# Altium PCB rev2.PcbDoc
Units mil, origin at the board's own origin, x right, y up, seen from the top; angles counter-clockwise.
Board outline 1000 x 800 mil, 2 copper layers (Top Layer, Bottom Layer); 3 components, 16 nets, 32 pads, 0 vias.
Unrouted connection lines stored in the file: 16.
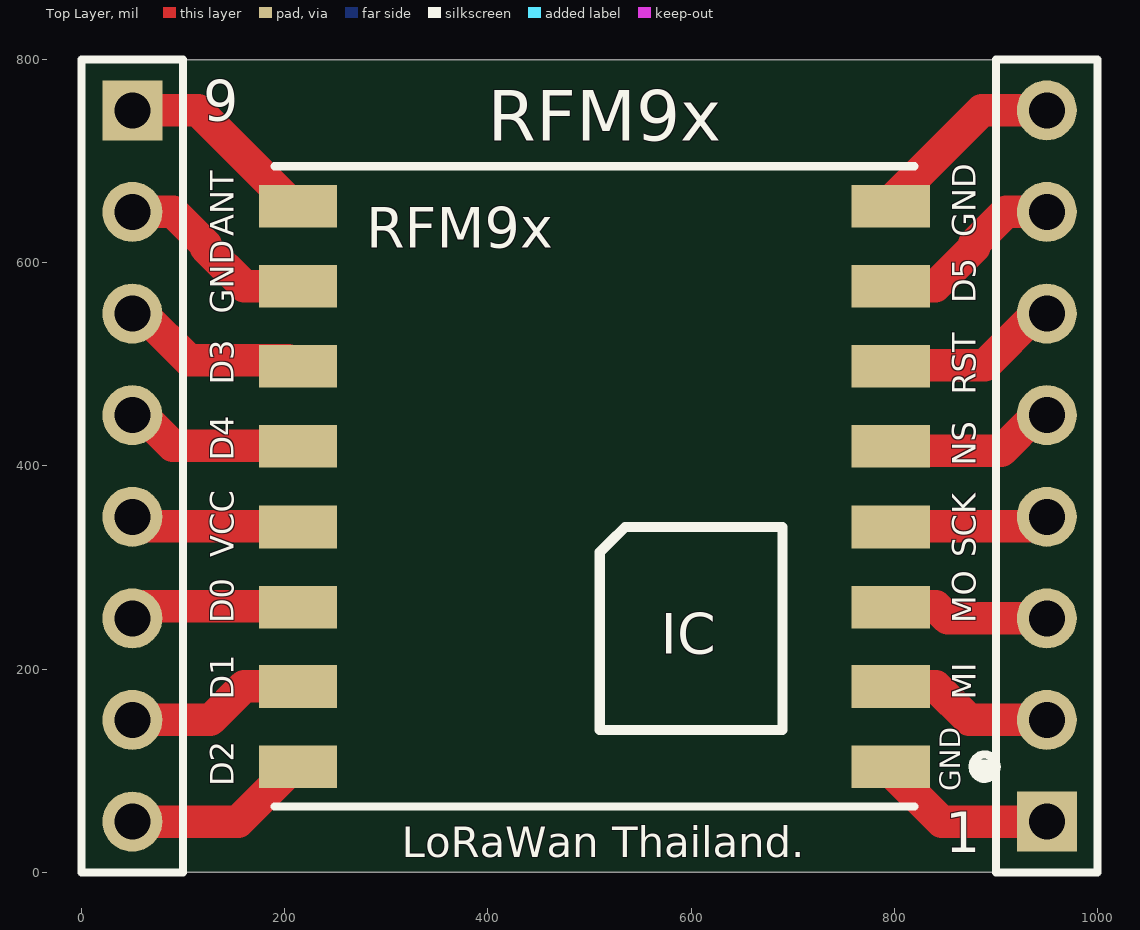
[diagram p0: Top Layer view]
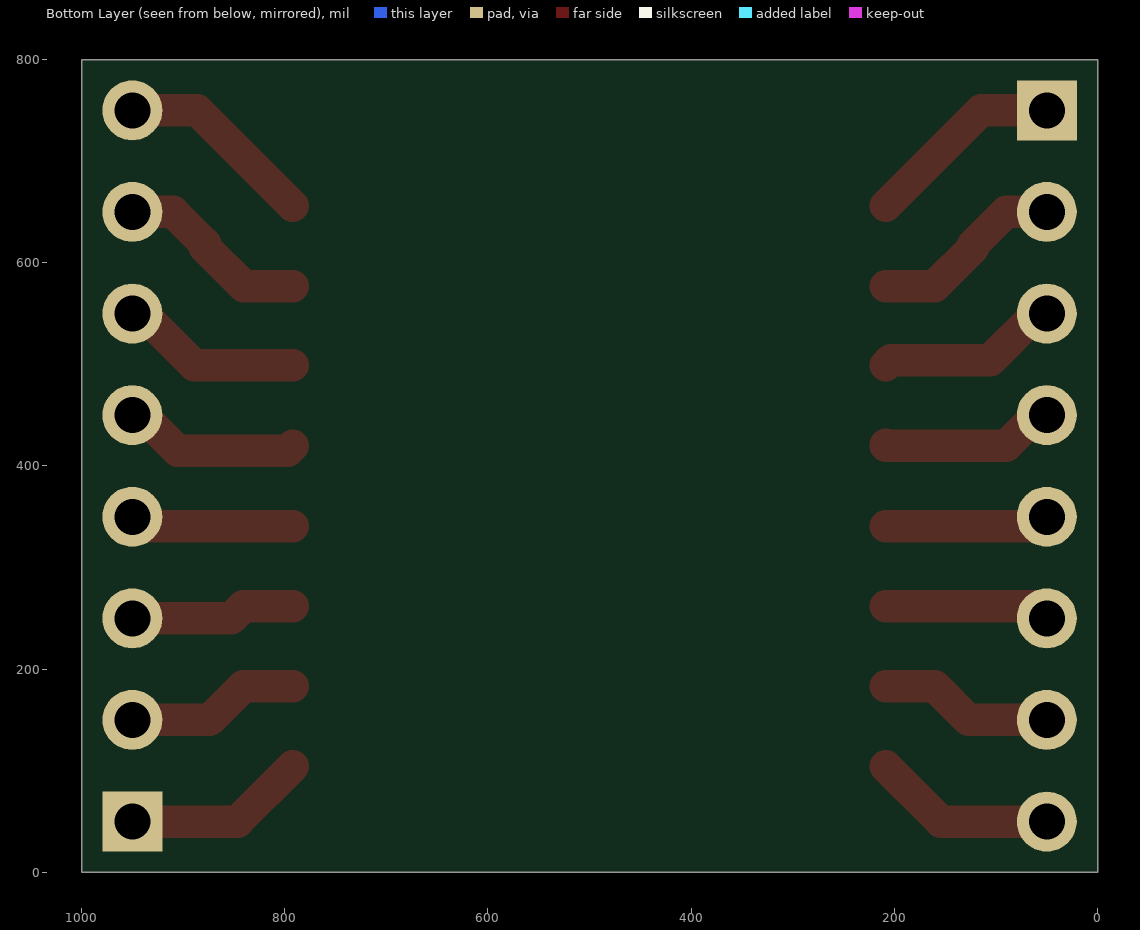
[diagram p1: Bottom Layer view, seen from below]

## Layer stack, top to bottom
Top Solder: solder mask 0.4, Solder Resist, Dk 3.5
Top Layer: signal copper 1.4
Dielectric 1: dielectric 12.6, FR-4, Dk 4.8
Bottom Layer: signal copper 1.4
Bottom Solder: solder mask 0.4, Solder Resist, Dk 3.5

## Board outline
0,0 0,800 1000,800 1000,0

## Design rules (kind name [scope] priority, off if disabled: settings)
Clearance [All] p1: gap=32
PolygonConnect [All] p1: connectstyle=Relief reliefconductorwidth=10 reliefentries=4 polygonreliefangle="90 Angle" airgapwidth=10
RoutingVias [All] p1: holewidth=28 width=50 viastyle="Through Hole" minholewidth=28 minwidth=50 maxholewidth=28 maxwidth=50
SolderMaskExpansion [All] p1: expansion=4
Width [All] p1: maxlimit=32 minlimit=32 preferedwidth=32
30 further rules are at their usual default settings.

## Components (designator, comment, footprint, x,y, rotation, side; value= is the part's Value field where it differs from the comment)
1 "Header 8" HDR1X8 950,50 r90 top (schematic designator P2)
9 "Header 8" HDR1X8 50,750 r270 top (schematic designator P1)
RFM9x "LoRa SX1276" XCVR_RFM95W-868S2 505,380 r180 top (schematic designator RFM9x?)

## Footprints (in the part's own frame and the unit in brackets; to place one, negate y for a bottom-side part, rotate by r counter-clockwise, add the part's x,y. Pads: shape width x height; smd on the part's side, far side on the other; paste and mask are expansions set on the pad)
HDR1X8 [mm] "Connector; Header; 8 Position"
  rect 1.5x1.5 hole 0.9: 1(0,0)
  round 1.5 hole 0.9: 2(2.54,0) 3(5.08,0) 4(7.62,0) 5(10.16,0) 6(12.7,0) 7(15.24,0) 8(17.78,0)
  silkscreen extent -1.27,-1.27 19.05,1.27
XCVR_RFM95W-868S2 [mil]
  rect 77x42 smd: 1(-291.34,276) 2(-291.34,197) 3(-291.34,119) 4(-291.34,40) 5(-291.34,-39.37) 6(-291.34,-118.11) 7(-291.34,-196.85) 8(-291.34,-275.59) 9(292,-275.59) 10(292,-196.85) 11(292,-118.11) 12(292,-39.37) 13(292,40) 14(292,119) 15(292,197) 16(292,276)
  silkscreen extent -396,-315 315,315, body extent -315,-313 315,313, height 88

## Part data
1 9: "Header, 8-Pin"
RFM9x: library part RFM95W-868S2

## Nets (pads, with @x,y where several pads share a name; then routed paths per layer and width w, separated by ;. In a path a pad name is that pad's centre, name@x,y a point inside that pad or via, vN(x,y) a via of type N, cw(c..) or ccw(c..) an arc to the next point about the centre after c; other vN are vias at no path point)
NetP1_1: 9.1 RFM9x.1 | length 197.6
  Top Layer w32: 9.1 114.66,750 208.66,656
NetP1_2: 9.2 RFM9x.2 | length 190.5
  Top Layer w32: 9.2 90,650 122.16,617.84 122.16,615.12 160.28,577 208.66,577
NetP1_3: 9.3 RFM9x.3 | length 179.8
  Top Layer w32: 9.3 59.64,550 105.64,504 203.66,504 208.66,499
NetP1_4: 9.4 RFM9x.4 | length 172.1
  Top Layer w32: 9.4 59.64,450 89.64,420 208.66,420 208.66,421
NetP1_5: 9.5 RFM9x.5 | length 162.5
  Top Layer w32: 9.5 59.37,340.63 208.66,340.63
NetP1_6: 9.6 RFM9x.6 | length 163.6
  Top Layer w32: 9.6 61.89,261.89 208.66,261.89
NetP1_7: 9.7 RFM9x.7 | length 172.4
  Top Layer w32: 9.7 126.87,150 160.02,183.15 208.66,183.15
NetP1_8: 9.8 RFM9x.8 | length 181.2
  Top Layer w32: 9.8 154.25,50 208.66,104.41
NetP2_1: 1.1 RFM9x.9 | length 180.5
  Top Layer w32: 792,104.41 846.41,50 1.1
NetP2_2: 1.2 RFM9x.10 | length 171.7
  Top Layer w32: 792,183.15 840.64,183.15 873.79,150 1.2
NetP2_3: 1.3 RFM9x.11 | length 165.1
  Top Layer w32: 792,261.89 840.64,261.89 852.53,250 1.3 1.3@950,252.15
NetP2_4: 1.4 RFM9x.12 | length 161.9
  Top Layer w32: 792,340.63 940.63,340.63 1.4
NetP2_5: 1.5 RFM9x.13 | length 174.7
  Top Layer w32: 792,420 797.18,414.82 905.18,414.82 940.36,450 1.5
NetP2_6: 1.6 RFM9x.14 | length 179.1
  Top Layer w32: 792,499 889,499 940,550 1.6
NetP2_7: 1.7 RFM9x.15 | length 190.2
  Top Layer w32: 792,577 840.38,577 878.5,615.12 878.5,618.5 910,650 1.7
NetP2_8: 1.8 RFM9x.16 | length 196.9
  Top Layer w32: 792,656 886,750 1.8

## Silkscreen, mask and mechanical layers (free items; w line width, h text height)
Top Overlay:
  text "ANT" at 150,626 h23 r90
  text "GND" at 880,625 h23 r90
  text "D5" at 880,560 h23 r90
  text "GND" at 150,550 h23 r90
  text "D3" at 150,480 h23 r90
  text "RST" at 880,470 h23 r90
  text "D4" at 150,405 h23 r90
  text "NS" at 880,400 h23 r90
  text "VCC" at 150,310 h23 r90
  text "SCK" at 880,310 h23 r90
  text "D0" at 150,245 h23 r90
  text "MO" at 880,245 h23 r90
  text "D1" at 150,170 h23 r90
  text "MI" at 880,170 h23 r90
  text "D2" at 150,85 h23 r90
  text "GND" at 865,80 h20 r90
  text "LoRaWan Thailand." at 315,15 h30
Mechanical 1:
  the board outline again, w10
Mechanical 4:
  circle w10: c360,590 r20
  rectangle: 345,575 375,605
  text "TouYunG" at 424,78 h25

## Dimensions
1000,0 to 1000,800 on Mechanical 16
0,800 to 1000,800 on Mechanical 16
50,750 to 950,750 on Mechanical 16

## Text inside footprints (layer, text, board x,y; h text height)
RFM9x: Top Overlay "IC" at 570,215 h40